# Altium PCB rugzak.PcbDoc
Units mil, origin at the board's own origin, x right, y up, seen from the top; angles counter-clockwise.
Board outline 6000 x 4000 mil, 2 copper layers (Top Layer, Bottom Layer); 40 components, 25 nets, 89 pads, 0 vias.
Unrouted connection lines stored in the file: 60.
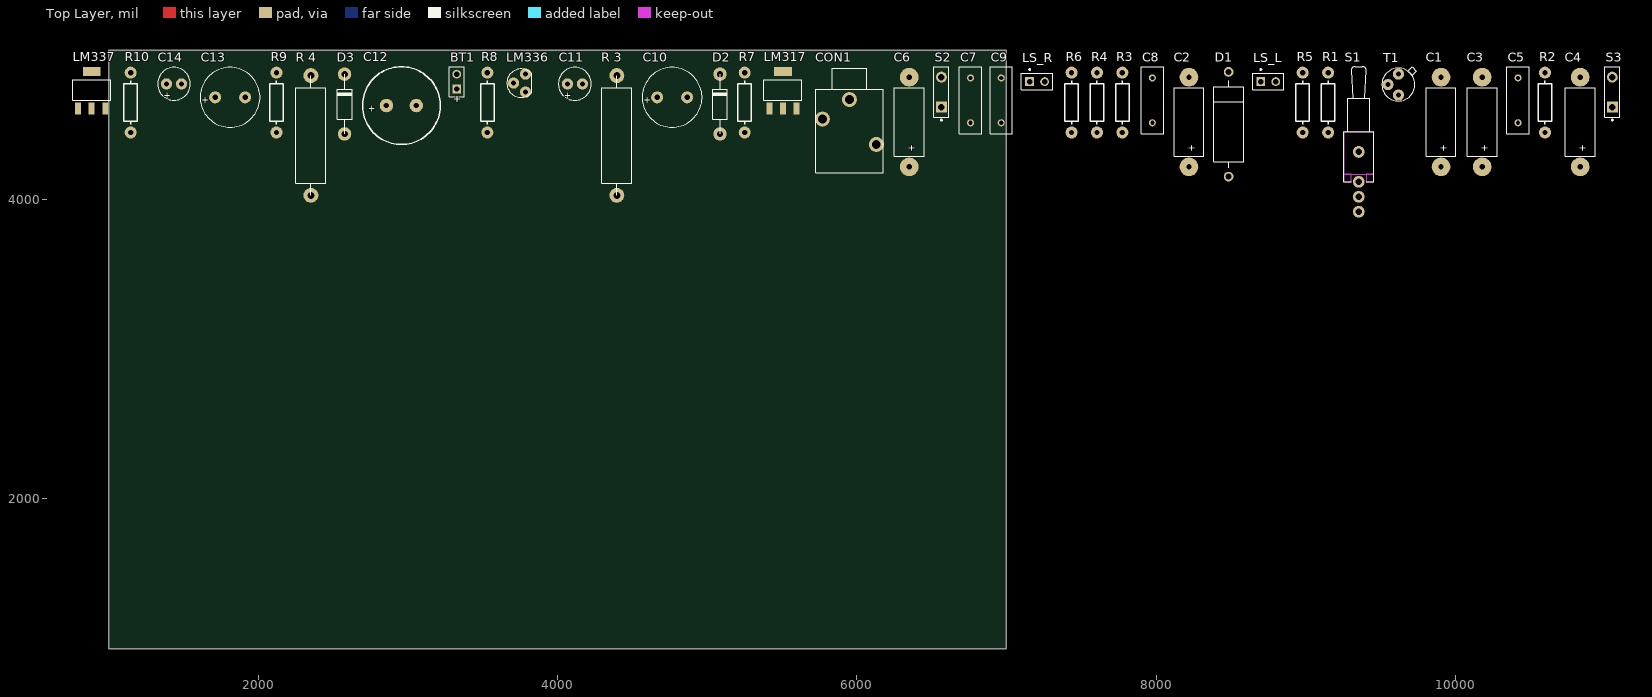
[diagram p0: Top Layer view]
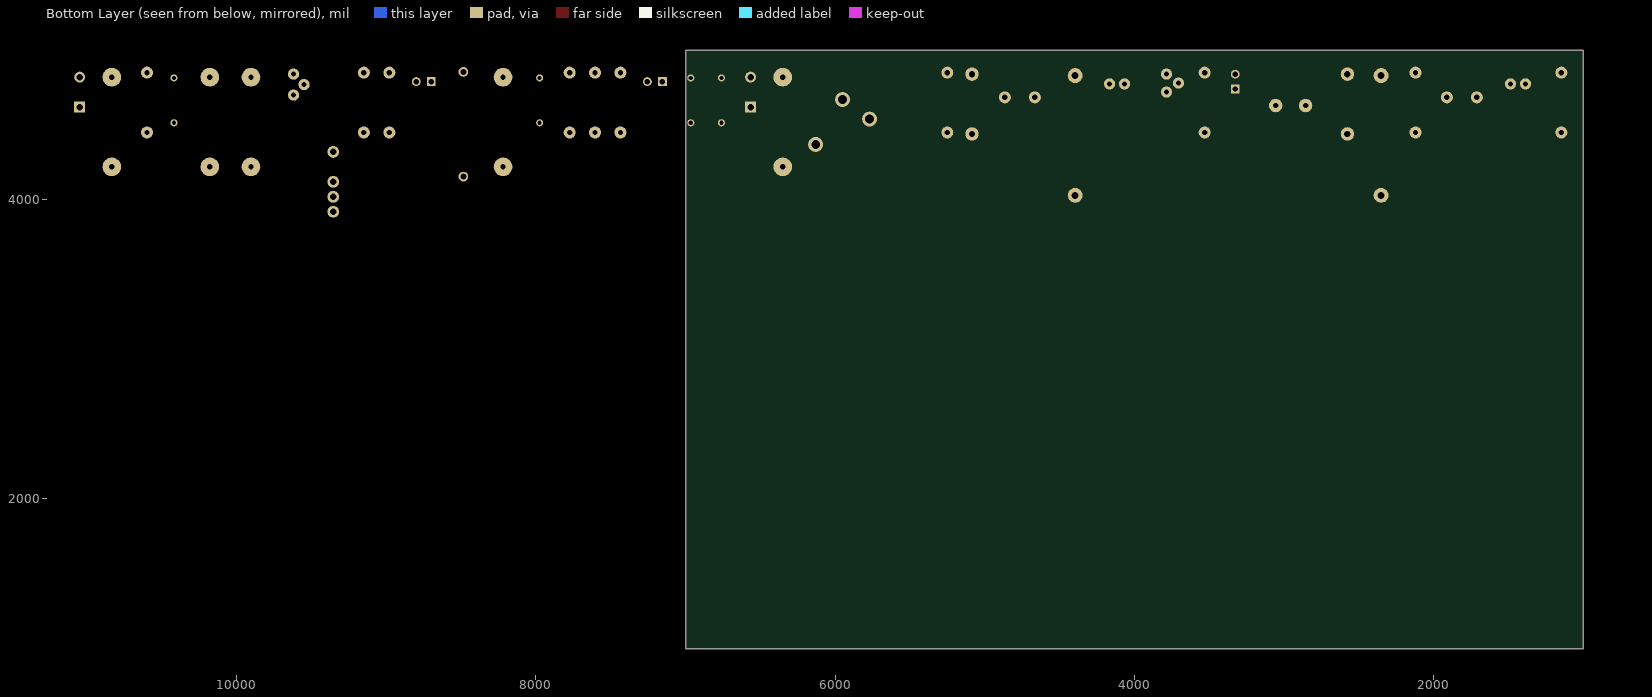
[diagram p1: Bottom Layer view, seen from below]

## Layer stack, top to bottom
Top Layer: signal copper 1.4
Dielectric: dielectric 12.6, FR-4, Dk 4.8
Bottom Layer: signal copper 1.4

## Board outline
1000,1000 7000,1000 7000,5000 1000,5000

## Design rules (kind name [scope] priority, off if disabled: settings)
Clearance [All] p1: gap=10
PolygonConnect [All] p1: connectstyle=Relief reliefconductorwidth=10 reliefentries=4 polygonreliefangle="90 Angle" airgapwidth=10
RoomDefinition rugzak [InComponentClass('rugzak')] p1: confinementstyle=ConfineIn formatcopy=TRUE lockcomponents=FALSE outline 740,935 7195,935 7195,5055 740,5055
RoutingVias [All] p1: holewidth=28 width=50 viastyle="Through Hole" minholewidth=28 minwidth=50 maxholewidth=28 maxwidth=50
SolderMaskExpansion [All] p1: expansion=4
Width [All] p1: maxlimit=10 minlimit=10 preferedwidth=10
28 further rules are at their usual default settings.

## Components (designator, comment, footprint, x,y, rotation, side; value= is the part's Value field where it differs from the comment)
BT1 "Battery" BAT-2 3325,4790 r90 top
C1 "Cap" "cap 48 pol (.46/.2/.6/125/36)" 9905,4520 r90 top
C2 "Cap" "cap 48 pol (.46/.2/.6/125/36)" 8220,4520 r90 top
C3 "Cap" "cap 48 pol (.46/.2/.6/125/36)" 10180,4520 r90 top
C4 "Cap" "cap 48 pol (.46/.2/.6/125/36)" 10835,4520 r90 top
C5 "100nF" RAD-0.3 10420,4665 r90 top
C6 "Cap" "cap 48 pol (.46/.2/.6/125/36)" 6350,4520 r90 top
C7 "Cap" RAD-0.3 6760,4665 r90 top
C8 "Cap" RAD-0.3 7975,4665 r90 top
C9 "Cap" RAD-0.3 6965,4665 r90 top
C10 "CECR1000uF/25V" "cap 64 pol (D.4/.2/80/36)" 4765,4685 r0 top
C11 "CECR22uF/35V" "cap 62 pol (D.22/.1/75/32)" 4115,4775 r0 top
C12 "CECR470uF/63V" "cap 63 pol (D.52/.2/90/36)" 2955,4630 r0 top
C13 "CECR1000uF/25V" "cap 64 pol (D.4/.2/80/36)" 1810,4685 r0 top
C14 "CECR22uF/35V" "cap 62 pol (D.22/.1/75/32)" 1435,4775 r0 top
CON1 "CON JACKSOCK3.5/MJ-352W-0" "con jacksock 3.5mm (MJ-352W-0)" 5950,4470 r90 top
D1 "D Zener" DIODE-0.7 8485,4505 r90 top
D2 "1N4002" DO-41 5085,4640 r90 top
D3 "1N4002" DO-41 2575,4640 r90 top
LM317 "LM1117MPX-3.3" "smd SOT-223" 5505,4735 r0 top
LM336 "LM78L05ACZ" TO-92 3785,4780 r0 top
LM337 "LM1117MPX-3.3" "smd SOT-223" 885,4735 r0 top
LS_L "Speaker" PIN2 8700,4790 r0 top
LS_R "Speaker" PIN2 7155,4790 r0 top
R1 "Res" "ws 0.6W H" 9150,4650 r90 top
R2 "Res" "ws 0.6W H" 10600,4650 r90 top
R3 "Res" "ws 0.6W H" 7775,4650 r90 top
R4 "Res" "ws 0.6W H" 7605,4650 r90 top
R5 "Res" "ws 0.6W H" 8980,4650 r90 top
R6 "Res" "ws 0.6W H" 7435,4650 r90 top
R7 "2K2" "ws 0.6W H" 5250,4650 r90 top
R8 "120R" "ws 0.6W H" 3530,4650 r90 top
R9 "2K2" "ws 0.6W H" 2120,4650 r90 top
R10 "120R" "ws 0.6W H" 1145,4650 r90 top
"R 3" "1R1/2.5W" "ws 2.5W H" 4395,4430 r90 top
"R 4" "1R1/2.5W" "ws 2.5W H" 2350,4430 r90 top
S1 "SW-SPDT" TL36WW15050 9355,4120 r90 top
S2 "SW-PB" SPST-2 6565,4720 r90 top
S3 "SW-SPST" SPST-2 11050,4720 r90 top
T1 "BC107" TO-18 9620,4770 r0 top

## Footprints (in the part's own frame and the unit in brackets; to place one, negate y for a bottom-side part, rotate by r counter-clockwise, add the part's x,y. Pads: shape width x height; smd on the part's side, far side on the other; paste and mask are expansions set on the pad)
BAT-2 [mm] "Battery; 2 Leads"
  rect 1.5x1.5 hole 0.9: 1(-1.27,0)
  round 1.5 hole 0.9: 2(1.27,0)
  silkscreen extent -2.54,-1.27 2.54,1.27
"cap 48 pol (.46/.2/.6/125/36)" [mil]
  round 125 / inner round 60 / far side round 125 hole 36 paste+0 mask+0: 1(-300,0) 2(300,0)
  silkscreen extent -230,-100 230,100
"cap 62 pol (D.22/.1/75/32)" [mil]
  round 75 / inner round 60 / far side round 75 hole 32 paste+0 mask+0: 1(-50,0) 2(50,0)
  silkscreen extent -110,-110 110,110
"cap 63 pol (D.52/.2/90/36)" [mil]
  round 90 / inner round 60 / far side round 90 hole 36 paste+0 mask+0: 1(-100,0) 2(100,0)
  silkscreen extent -260,-260 260,260
"cap 64 pol (D.4/.2/80/36)" [mil]
  round 80 / inner round 60 / far side round 80 hole 36 paste+0 mask+0: 1(-100,0) 2(100,0)
  silkscreen extent -200,-200 200,200
"con jacksock 3.5mm (MJ-352W-0)" [mil]
  round 100 / inner round 60 / far side round 100 hole 59 paste+0 mask+0: 1(200,0) 2(70,180) 3(-100,-180)
  silkscreen extent -290,-225 410,225
DIODE-0.7 [mm] "Diode, Thru-Hole; 2 Leads; 0.7 in Pin Spacing"
  round 1.65 hole 1: 1(-8.89,0) 2(8.89,0)
  silkscreen extent -7.37,-2.54 7.37,2.54
DO-41 [mil]
  round 90 / inner round 60 / far side round 90 hole 43 paste+0 mask+0: 1(-200,0) 2(200,0)
  silkscreen extent -200,-50 200,50
PIN2 [mm] "Photosensitive Diode; 2 Leads"
  rect 1.5x1.5 hole 0.9: 1(0,0)
  round 1.5 hole 0.9: 2(2.54,0)
  silkscreen extent -1.4,-1.4 3.94,2.17
RAD-0.3 [mm] "Radial Cap, Thru-Hole; 2 Leads; 0.3 in Pin Spacing"
  round 1.2 hole 0.7: 1(-3.81,0) 2(3.81,0)
  silkscreen extent -5.71,-1.91 5.71,1.91
"smd SOT-223" [mil]
  rect 40x80 smd paste+0 mask+0: 1(-90.55,-124.02) 2(0,-124.02) 3(90.55,-124.02)
  rect 120x60 smd paste+0 mask+0: 4(0,124.02)
  silkscreen extent -128,-69 128,69
SPST-2 [mm] "Switch; 2 Leads"
  rect 1.85x1.85 hole 1.1: 1(-2.54,0)
  round 1.85 hole 1.1: 2(2.54,0)
  silkscreen extent -4.89,-1.27 4.28,1.27
TL36WW15050 [mm] "Switch; 4 Leads"
  round 2 hole 1.1: 1(0,0) 2(-2.54,0) 3(-5.08,0) M(5.08,0)
  Top Layer keep-out region: 0,-1.27 0,-2.54 1.27,-2.54 1.27,-1.27
  Top Layer keep-out region: 0,2.54 0,1.27 1.27,1.27 1.27,2.54
  Top Layer keep-out region: 1.27,2.54 1.27,-2.54 8.509,-2.54 8.509,2.54
  silkscreen extent 0,-2.54 19.56,2.54
TO-18 [mil]
  round 75 / inner round 60 / far side round 75 hole 32 paste+0 mask+0: 1(0,70) 2(-70,0) 3(0,-70)
  silkscreen extent -110,-110 120,118
TO-92 [mil]
  round 75 / inner round 60 / far side round 75 hole 32 paste+0 mask+0: 1(0,60) 2(-80,0) 3(0,-60)
  silkscreen extent -125,-95 40,95
"ws 0.6W H" [mil]
  round 80 hole 36: 1(-200,0) 2(200,0)
  silkscreen extent -145,-45 145,45
"ws 2.5W H" [mil]
  round 100 / inner round 60 / far side round 100 hole 47 paste+0 mask+0: 1(-400,0) 2(400,0)
  silkscreen extent -400,-100 400,100

## Part data
BT1: "Multicell Battery"
C1 C2 C3 C4 C6: library part CECA0.47uF/63V, "elektrolytische condensator axiaal 0.47uF/63V"
C5: library part Cap, "Capacitor"
C7 C8 C9: "Capacitor"
C10 C13: "elektrolytische condensator radiaal 1000uF/25V"
C11 C14: "elektrolytische condensator radiaal 22uF/35V"
C12: "elektrolytische condensator radiaal 470uF/63V"
CON1: "audio socket 3.5mm stereo, MJ-352W-0"
D1: "Zener Diode"
D2 D3: "gelijkrichterdiode 100V/1A"
LM317 LM337: "low dropout linear regulator, 3.3V 800mA, SOT-223"
LM336: "spanningsregelaar, +5V, TO-92"
LS_L LS_R: "Loudspeaker"
R1 R2 R3 R4 R5 R6: library part 0R2, "weerstand 0R2 0.6W"
R7 R9: "weerstand 2K2 0.6W"
R8 R10: "weerstand 120R 0.6W"
"R 3" "R 4": "weerstand 1R1 2.5W"
S1: "SPDT Subminiature Toggle Switch, Right Angle Mounting, Vertical Actuation"
S2: "Switch"
S3: "Single-Pole, Single-Throw Switch"
T1: "NPN transistor"

## Nets (pads, with @x,y where several pads share a name; then routed paths per layer and width w, separated by ;. In a path a pad name is that pad's centre, name@x,y a point inside that pad or via, vN(x,y) a via of type N, cw(c..) or ccw(c..) an arc to the next point about the centre after c; other vN are vias at no path point)
+VS: BT1.1 C10.1 C12.1 D2.2 LM317.3 S3.2
-VS: BT1.2 C12.2 C13.2 C14.2 D3.1 LM337.2 R10.1
GND: "R 3.1" "R 4.2" C4.2 C5.1 C6.2 C7.1 C8.1 C9.1 C10.2 C13.1 CON1.1 D1.1 D2.1 D3.2 LS_L.1 LS_R.1 R3.1 S1.3 S2.1
NetC1_1: C1.1
NetC1_2: C1.2 CON1.2
NetC2_1: C2.1
NetC2_2: C2.2 CON1.3
NetC3_1: C3.1 C4.1 C5.2 R2.2 S1.1 S3.1
NetC3_2: C3.2 R2.1 T1.3
NetC6_1: C6.1 C7.2
NetC8_2: C8.2 R5.2
NetC9_2: C9.2 R6.1
NetC11_1: C11.1 R7.1
NetC11_2: C11.2 LM336.2 LM337.1 R8.1
NetC14_1: C14.1 LM317.1 LM336.3 R9.1
NetD1_2: D1.2 R1.1 T1.2
NetLM317_2: "R 3.2" LM317.2
NetLM337_3: "R 4.1" LM337.3
NetLS_L_2: LS_L.2 R5.1
NetLS_R_2: LS_R.2 R6.2
NetR1_2: R1.2 S1.2
NetR3_2: R3.2 R4.2 T1.1
NetR4_1: R4.1 S2.2
NetR7_2: R7.2 R8.2
NetR9_2: R9.2 R10.2
pads on no net: LM317.4 LM336.1 LM337.4 S1.M

## Text inside footprints (layer, text, board x,y; h text height)
BT1: Top Overlay "+" at 3347.72,4645.51 h45.28 r90
C1: Top Overlay "+" at 9942,4320 h42 r90
C2: Top Overlay "+" at 8257,4320 h42 r90
C3: Top Overlay "+" at 10217,4320 h42 r90
C4: Top Overlay "+" at 10872,4320 h42 r90
C6: Top Overlay "+" at 6387,4320 h42 r90
C10: Top Overlay "+" at 4575,4645 h42
C11: Top Overlay "+" at 4045,4675 h42
C12: Top Overlay "+" at 2735,4590 h42
C13: Top Overlay "+" at 1620,4645 h42
C14: Top Overlay "+" at 1365,4675 h42